# EAGLE board LVDStoCMOS_DB15 (EAGLE 8.1.0)
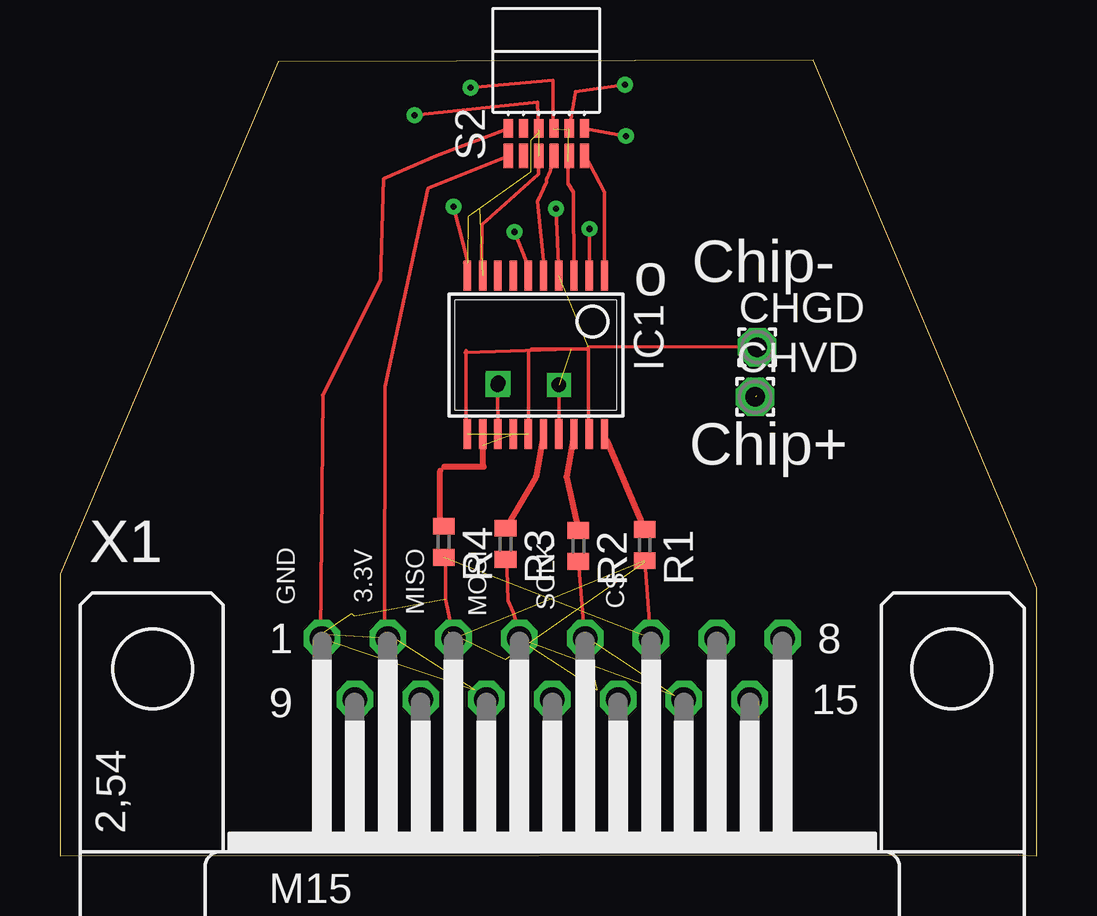
[diagram p0: board, top side]
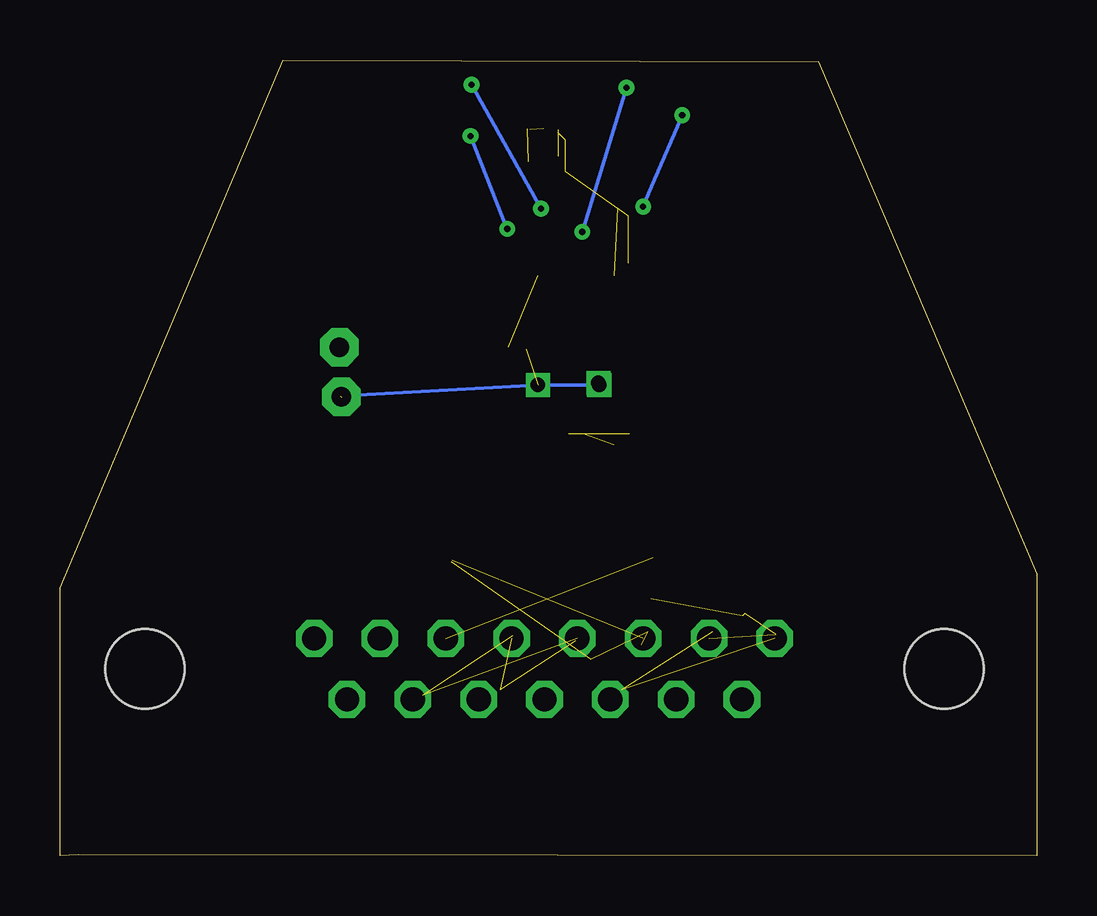
[diagram p1: board, bottom side, seen from below]

Size 40.72 x 33.19 mm. Coordinates in mm from the lower left corner, seen from the top.
Outline: 0,0 39.95,0.06 40.72,0.01 40.72,11.17 31.41,33.19 9.1,33.12 0,11.76 0,0.64 0,0
Copper layers (1*16): Top 0.035mm / dielectric 1.5mm / Bottom 0.035mm
Design rules "default": minimum track width 10mil, minimum drill 24mil, track to track 8mil, track to pad 8mil, pad to pad 8mil, via to via 8mil, smd to smd 8mil, copper to edge 40mil, drill to drill 8mil, minimum pad ring 10mil, minimum via ring 8mil, stop-mask expansion 4mil, vias tented up to drill 0mil, thermal gap 10mil

## Footprints (pad centres in the part's own frame; a part is rotated, then mirrored left to right if it is on the bottom)
1,6/0,8 = drill 0.813 pad 1.6 octagon: 1 0,0
SSOP20 = smd 0.305 x 1.245: 1 -2.857,-3.302; 2 -2.222,-3.302; 3 -1.587,-3.302; 4 -0.952,-3.302; 5 -0.317,-3.302; 6 0.318,-3.302; 7 0.953,-3.302; 8 1.588,-3.302; 9 2.223,-3.302; 10 2.858,-3.302; 11 2.858,3.302; 12 2.223,3.302; 13 1.588,3.302; 14 0.953,3.302; 15 0.318,3.302; 16 -0.317,3.302; 17 -0.952,3.302; 18 -1.587,3.302; 19 -2.222,3.302; 20 -2.857,3.302
R0402 = smd 0.7 x 0.9: 1 -0.65,0; 2 0.65,0
OMNETICS_PZN-12-AA = smd 0.381 x 0.762: B1 1.587,-1.016; B2 0.953,-1.016; B3 0.318,-1.016; B4 -0.318,-1.016; B5 -0.953,-1.016; B6 -1.587,-1.016 | smd 0.381 x 1.016: T1 1.587,-2.159; T2 0.953,-2.159; T3 0.318,-2.159; T4 -0.318,-2.159; T5 -0.953,-2.159; T6 -1.587,-2.159
M15H = drill 1.016 octagon: 1 -9.601,1.27; 2 -6.858,1.27; 3 -4.115,1.27; 4 -1.372,1.27; 5 1.372,1.27; 6 4.115,1.27; 7 6.858,1.27; 8 9.601,1.27; 9 -8.23,-1.27; 10 -5.486,-1.27; 11 -2.743,-1.27; 12 0,-1.27; 13 2.743,-1.27; 14 5.486,-1.27; 15 8.23,-1.27 | hole 3.302: 16.662,0; -16.662,0

## Placement (x,y rotation side)
CHGD  [1,6/0,8]  29.07,21.21 0 top
CHVD  [1,6/0,8]  28.98,19.14 0 top
IC1  PLL1700E  [SSOP20]  19.84,20.89 180 top
R1  [R0402]  24.37,12.96 270 top
R2  [R0402]  21.61,12.93 270 top
R3  [R0402]  18.57,13.01 270 top
R4  [R0402]  15.99,13.1 270 top
S2  RHD2000-CABLE-AMP-SIDE  [OMNETICS_PZN-12-AA]  20.27,31.35 0 top
X1  [M15H]  20.52,7.8 0 top

## Library data of the parts
CHGD CHVD = wirepad
IC1 = texas; MF: TEXAS INSTRUMENT CONNECTORS; MPN: PLL1700E; OC_FARNELL: unknown; OC_NEWARK: 36K3452
R1-R4 = resistor
S2 = RHD2000
X1 = con-subd; OC_FARNELL: unknown; OC_NEWARK: unknown

## Nets
DNGP: IC1.7
GND: IC1.4 IC1.11 IC1.15 IC1.19
N$1: IC1.20 R1.1
N$2: IC1.18 R2.1
N$3: IC1.16 R3.1
N$4: IC1.14 R4.1
N$5: IC1.2 S2.B1
N$6: CHVD.1 IC1.13 IC1.17
N$7: IC1.1 S2.T1
N$8: IC1.3 S2.B2
N$9: S2.T2
N$10: S2.B3
N$11: IC1.5 S2.T3
N$12: IC1.9 S2.T4
N$13: R1.2 X1.3
N$14: S2.B6 X1.2
N$15: S2.T6 X1.1
N$17: S2.B4
N$18: R2.2 X1.4
N$19: R3.2 X1.5
N$20: R4.2 X1.6
VDDP: IC1.8

## Tracks (layer width: path | path; a pad name or v marks a point on that pad's centre or on a via)
GND  (via drill 0.25 pad 0.25)  (3 unrouted)
  Top 0.152: IC1.4 v20.67,26.99 | 21.13,30.28 21.13,30.26 21.22,30.35 21.25,30.35 21.5,31.87 v23.56,32.16 | 19.49,24.67 v18.95,26.02 | 20.57,30.32 20.54,30.34 20.55,32.35 v17.11,32.04 | 20.57,30.32 | IC1.19 22.03,17.63 22.03,21.22 | 22.03,21.22 21.95,21.14 19.66,21.14 19.52,21.01 IC1.15 | IC1.11 16.92,17.65 16.92,21.07 | 22.03,21.22 29.34,21.24
  Bottom 0.152: v18.95,26.02 v17.11,32.04 | v20.67,26.99 v23.56,32.16
N$1
  Top 0.254: IC1.20 22.7,17.52 arc45 22.77,17.34 R1.1
N$2
  Top 0.254: IC1.18 21.11,15.81 R2.1
N$3
  Top 0.254: IC1.16 19.84,15.81 R3.1
N$4  (1 unrouted)
  Top 0.152: R4.1 15.85,13.9 | 15.85,16.06 16.03,16.24 | 17.67,16.24 17.63,16.28
  Top 0.254: 15.85,13.9 15.85,16.06 | 16.03,16.24 17.67,16.24 | 17.63,16.28 17.63,17.13
N$5  (via drill 0.25 pad 0.25)
  Top 0.152: 21.86,30.12 S2.B1 v23.6,30.02 | IC1.2 v22.07,26.15
  Bottom 0.152: v22.07,26.15 v23.6,30.02
N$6  (via drill 0.6)  (2 unrouted)
  Top 0.152: IC1.13 v18.24,19.63 | IC1.17 20.8,17.88 v20.8,19.64 | 16.89,21 21.3,21.14
  Bottom 0.152: 29.03,19.17 v20.8,19.64 v18.24,19.63
N$7
  Top 0.152: IC1.1 22.69,27.68 21.86,29.26 S2.T1
N$8  (1 unrouted)
  Top 0.152: IC1.3 21.4,27.68 21.19,28.04 21.19,28.95
N$11
  Top 0.152: IC1.5 20.19,24.41 19.9,27.28 20.29,28.09 20.29,28.19 20.43,28.54 S2.T3
N$12  (via drill 0.25 pad 0.25)  (4 unrouted)
  Top 0.152: S2.T4 19.96,28.42 17.6,26.31 17.58,24.72 17.56,24.71 | 17.01,24.71 16.87,24.71 17,24.71 v16.41,27.07 | v14.78,30.88 19.91,31.42 19.95,30.29
  Bottom 0.152: v16.41,27.07 16,28.06 v14.78,30.88
N$13  (1 unrouted)
N$14  (7 unrouted)
  Top 0.152: S2.B6 | S2.B6 15.69,29.2 13.48,28.25 13.36,24.02 10.95,19.2 10.97,19.25 10.87,9.24 | 24.64,8.9 24.39,12.27 | 16.07,12.46 16.07,10.72 16.48,8.81
N$15  (2 unrouted)
  Top 0.152: S2.T6 15.35,27.84 13.54,19.57 13.52,9.35
N$16  (via drill 0.6)
  other vias: 18.27,19.72
N$17  (3 unrouted)
  Top 0.152: 19.96,30.16 S2.B4
N$18  (2 unrouted)
  Top 0.152: R2.2 21.86,9.18
N$19  (2 unrouted)
  Top 0.152: R3.2 18.62,12.57 18.67,10.65 18.9,10.14 19.24,8.97
N$20  (1 unrouted)

## Text on the board
tNames: Chip- | o | Chip+ | 3.3V | GND | MISO | MOSI | SCLK | CS